# EAGLE board Esp32IoAdapt (EAGLE 9.6.2)
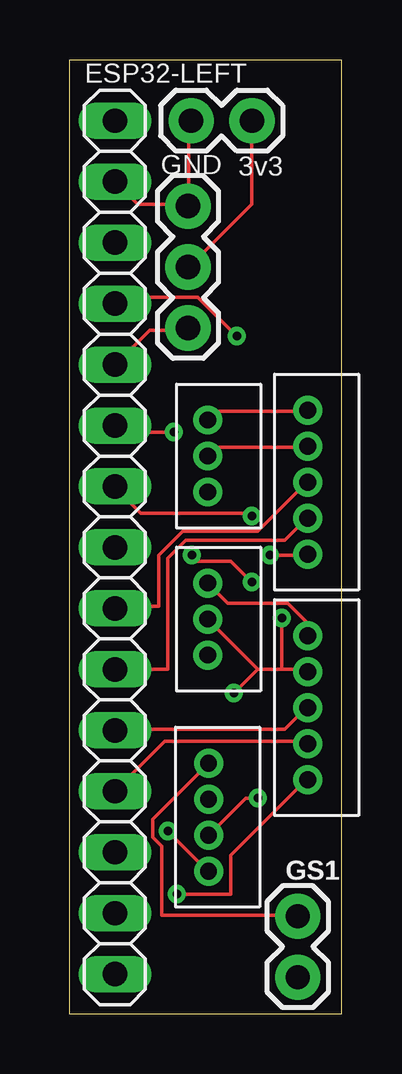
[diagram p0: board, top side]
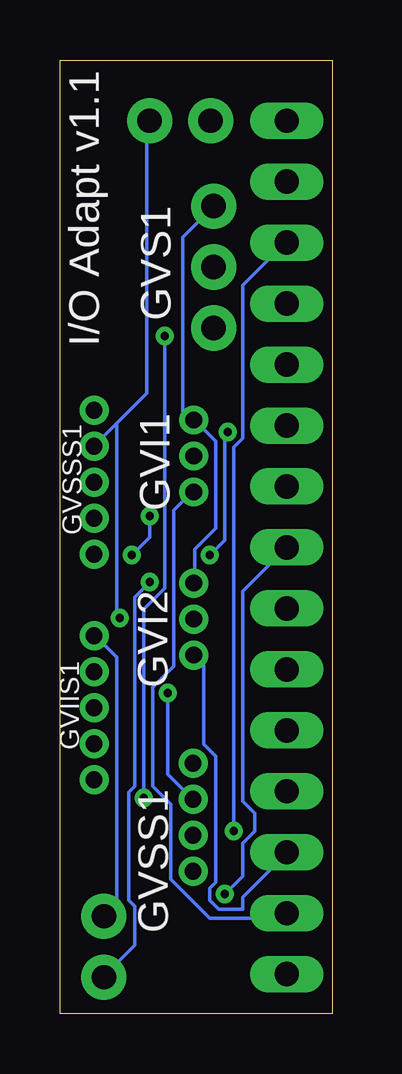
[diagram p1: board, bottom side, seen from below]

Size 11.35 x 39.74 mm. Coordinates in mm from the lower left corner, seen from the top.
Outline: 0,0 11.35,0 11.35,39.74 0,39.74 0,0
Copper layers (1*16): Top 0.035mm / dielectric 1.5mm / Bottom 0.035mm
Design rules "default": minimum track width 6mil, minimum drill 0.35mm, track to track 6mil, track to pad 6mil, pad to pad 6mil, via to via 6mil, smd to smd 6mil, copper to edge 40mil, drill to drill 6mil, minimum pad ring 10mil, minimum via ring 8mil, stop-mask expansion 4mil, vias tented up to drill 0mil, thermal gap 10mil

## Footprints (pad centres in the part's own frame; a part is rotated, then mirrored left to right if it is on the bottom)
1X15 = drill 1.016 long: 1 -17.78,0; 2 -15.24,0; 3 -12.7,0; 4 -10.16,0; 5 -7.62,0; 6 -5.08,0; 7 -2.54,0; 8 0,0; 9 2.54,0; 10 5.08,0; 11 7.62,0; 12 10.16,0; 13 12.7,0; 14 15.24,0; 15 17.78,0
1X02 = drill 1.016 pad 1.88: 1 0,0; 2 2.54,0
B3B-ZR = drill 0.7 pad 1.1: 1 -1.5,0; 2 0,0; 3 1.5,0
B5B-ZR = drill 0.7: 1 7.5,-1.3; 2 6,-1.3; 3 4.5,-1.3; 4 3,-1.3; 5 1.5,-1.3
1X03 = drill 1.016 pad 1.88: 1 0,0; 2 2.54,0; 3 5.08,0
B4B-ZR = drill 0.7: 1 6,-1.3; 2 4.5,-1.3; 3 3,-1.3; 4 1.5,-1.3

## Placement (x,y rotation side)
ESP32-RIGHT  0  [1X15]  1.91,19.43 270 top
GS1  [1X02]  9.53,4.06 270 top
GVI1  B3B-ZR  [B3B-ZR]  5.78,23.24 90 top
GVI2  B3B-ZR  [B3B-ZR]  5.78,16.45 90 top
GVIIS1  B5B-ZR  [B5B-ZR]  8.64,8.26 90 top
GVS1  [1X03]  4.95,33.66 270 top
GVSS1  B4B-ZR  [B4B-ZR]  4.51,4.45 90 top
GVSSS1  B5B-ZR  [B5B-ZR]  8.64,17.65 90 top
PWR  [1X02]  5.08,37.21 0 top

## Library data of the parts
ESP32-RIGHT = pinhead
GS1 GVS1 PWR = SparkFun-Connectors
GVI1 GVI2 GVIIS1 GVSS1 GVSSS1 = jst

## Nets
3V3: GVI1.2 GVI2.2 GVIIS1.2 GVS1.2 GVSS1.2 GVSSS1.2 PWR.2
D12: ESP32-RIGHT.4 GVSS1.3
D13: ESP32-RIGHT.3 GVSS1.4
D14: ESP32-RIGHT.5 GVS1.3
D25: ESP32-RIGHT.8 GVIIS1.5
D26: ESP32-RIGHT.7 GVSSS1.5
D27: ESP32-RIGHT.6 GS1.2
D32: ESP32-RIGHT.10 GVSSS1.4
D33: ESP32-RIGHT.9 GVSSS1.3
GND: ESP32-RIGHT.2 GS1.1 GVI1.3 GVI2.3 GVIIS1.1 GVS1.1 GVSS1.1 GVSSS1.1 PWR.1
I34: ESP32-RIGHT.12 GVIIS1.4
I35: ESP32-RIGHT.11 GVIIS1.3
I36: ESP32-RIGHT.14 GVI1.1
I39: ESP32-RIGHT.13 GVI2.1
RESET: ESP32-RIGHT.15
VIN: ESP32-RIGHT.1

## Tracks (layer width: path | path; a pad name or v marks a point on that pad's centre or on a via)
3V3  (via drill 0.35)
  Top 0.152: 7.87,14.37 5.87,16.37 GVI2.2 | 8.87,14.37 9.87,14.37 GVIIS1.2 | 8.87,14.37 7.87,14.37 | 7.87,14.37 v6.87,13.37 | GVI1.2 5.87,23.24 6.24,23.62 9.87,23.62 GVSSS1.2 | GVS1.2 4.99,31.12 7.62,33.74 7.62,37.12 PWR.2 | v8.87,16.49 8.87,14.37
  Bottom 0.152: v6.87,13.37 6.87,9.99 5.87,8.99 GVSS1.2 | 8.99,24.62 7.74,25.87 7.74,37.12 PWR.2 | 8.99,24.62 9.87,23.74 GVSSS1.2 | v8.87,16.49 8.99,16.62 8.99,24.62
D12  (via drill 0.35)
  Top 0.152: v7.87,8.99 7.37,8.99 5.87,7.49 GVSS1.3 | v6.99,28.24 5.37,29.87 2.24,29.87 1.99,29.62 ESP32-RIGHT.4
  Bottom 0.152: v7.87,8.99 7.87,16.87 6.99,17.74 v6.99,28.24
D13  (via drill 0.35)
  Top 0.152: v4.12,7.62 5.74,5.99 GVSS1.4
  Bottom 0.152: v4.12,7.62 4.12,23.62 3.74,23.99 3.74,30.37 1.99,32.12 ESP32-RIGHT.3
D14
  Top 0.152: ESP32-RIGHT.5 1.99,27.12 3.37,28.49 4.87,28.49 GVS1.3
D25  (via drill 0.35)
  Top 0.152: v4.49,4.99 6.74,4.99 6.74,6.62 9.87,9.74 GVIIS1.5
  Bottom 0.152: v4.49,4.99 3.74,5.74 3.74,7.12 3.24,7.62 3.24,8.37 3.74,8.87 3.74,17.62 1.99,19.37 ESP32-RIGHT.8
D26  (via drill 0.35)
  Top 0.152: v8.37,19.12 9.87,19.12 GVSSS1.5 | v7.62,20.74 7.49,20.87 2.99,20.87 1.99,21.87 ESP32-RIGHT.7
  Bottom 0.152: v8.37,19.12 7.62,19.87 v7.62,20.74
D27  (via drill 0.35)
  Top 0.152: v4.37,24.24 2.24,24.24 1.99,24.49 ESP32-RIGHT.6 | v5.12,19.12 5.37,18.87 6.74,18.87 v7.62,17.99
  Bottom 0.152: v4.37,24.24 4.49,24.12 4.49,19.74 v5.12,19.12 | v7.62,17.99 8.24,17.37 8.24,9.49 8.49,9.24 8.49,4.74 8.24,4.49 8.24,2.87 9.49,1.62 GS1.2
D32
  Top 0.152: GVSSS1.4 9.87,20.62 8.99,19.74 4.87,19.74 4.12,18.99 4.12,14.37 1.99,14.37 ESP32-RIGHT.10
D33
  Top 0.152: GVSSS1.3 9.87,22.12 7.87,20.12 4.74,20.12 3.74,19.12 3.74,16.99 1.99,16.99 ESP32-RIGHT.9
GND
  Top 0.152: GVSS1.1 5.74,10.37 3.49,8.12 3.49,7.37 3.87,6.99 3.87,4.12 9.49,4.12 GS1.1 | ESP32-RIGHT.2 1.99,34.62 2.87,33.74 4.87,33.74 GVS1.1 4.99,33.74 4.99,37.12 PWR.1 | GVI1.3 5.87,24.74 6.24,25.12 9.87,25.12 GVSSS1.1 | GVI2.3 5.87,17.87 6.62,17.12 9.12,17.12 9.87,16.37 9.87,15.87 GVIIS1.1
  Bottom 0.152: GVI2.3 5.74,17.99 5.74,19.37 4.87,20.24 4.87,23.87 5.74,24.74 GVI1.3 5.87,24.74 6.24,25.12 6.24,32.37 4.99,33.62 GVS1.1 | GS1.1 9.49,4.12 8.99,4.62 8.99,14.87 9.87,15.74 GVIIS1.1
I34
  Top 0.152: GVIIS1.4 9.87,11.37 3.99,11.37 1.99,9.37 ESP32-RIGHT.12
I35
  Top 0.152: GVIIS1.3 9.87,12.74 8.99,11.87 1.99,11.87 ESP32-RIGHT.11
I36
  Bottom 0.152: GVI1.1 5.87,21.74 6.62,20.99 6.62,14.49 7.49,13.62 7.49,9.49 6.74,8.74 6.74,5.62 5.12,3.99 1.99,3.99 1.99,4.12 ESP32-RIGHT.14
I39
  Bottom 0.152: GVI2.1 5.74,14.87 5.37,14.49 5.37,11.24 4.87,10.74 4.87,5.49 5.12,5.24 5.12,4.74 4.74,4.37 3.74,4.37 3.74,4.87 1.99,6.62 ESP32-RIGHT.13

## Text on the board
tNames: ESP32-LEFT | GND | 3v3
bNames: I/O Adapt v1.1 | GVS1